# Altium PCB Volta-Interface.PcbDoc (part 1 of 2)
Units mil, origin at the board's own origin, x right, y up, seen from the top; angles counter-clockwise.
Board outline 3346.46 x 1023.62 mil, 2 copper layers (Component Side, Bottom Layer), stack 42.17 mil thick; 48 components, 34 nets, 179 pads, 58 vias.
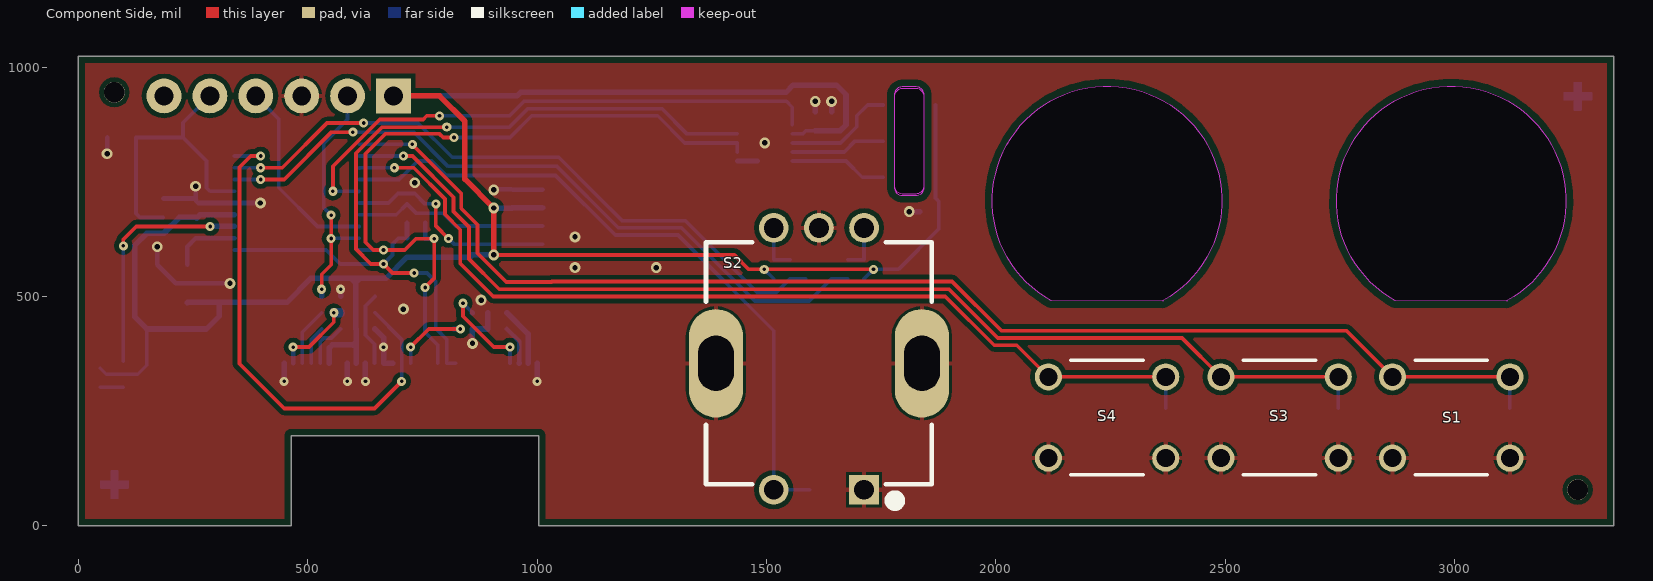
[diagram p0: Component Side view]
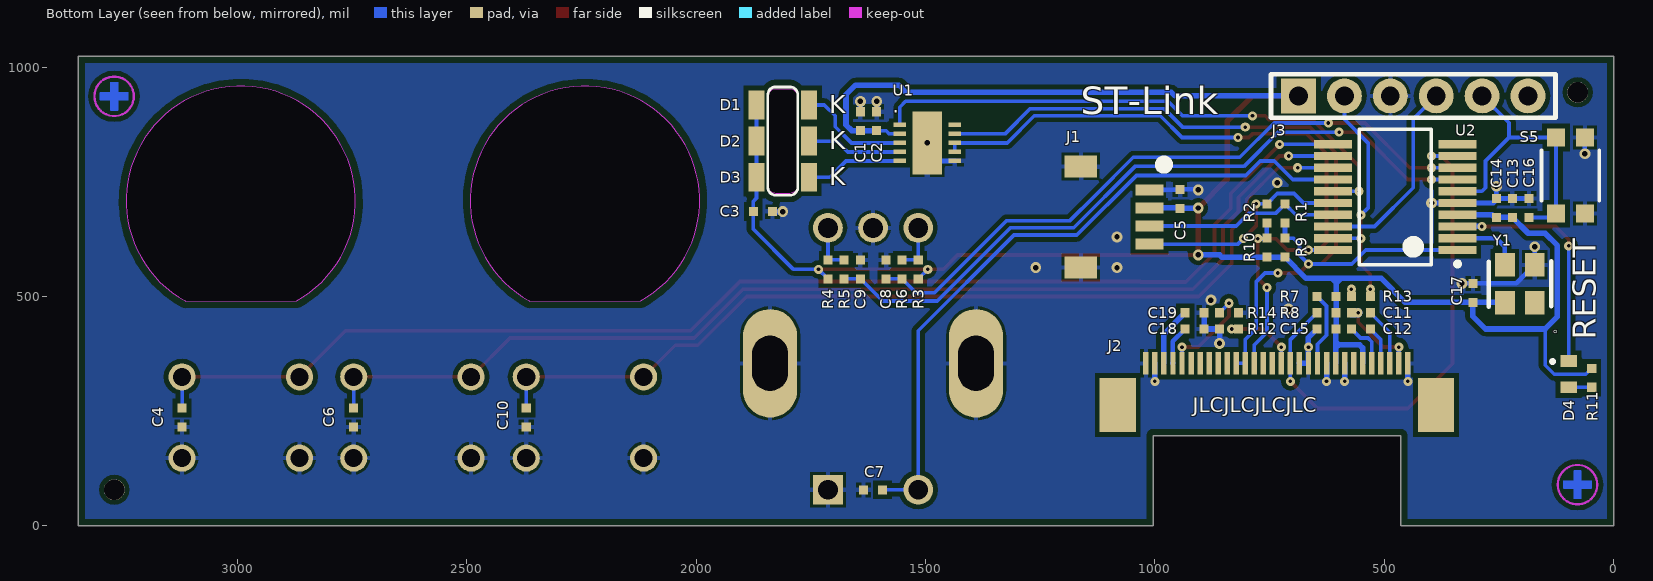
[diagram p1: Bottom Layer view, seen from below]
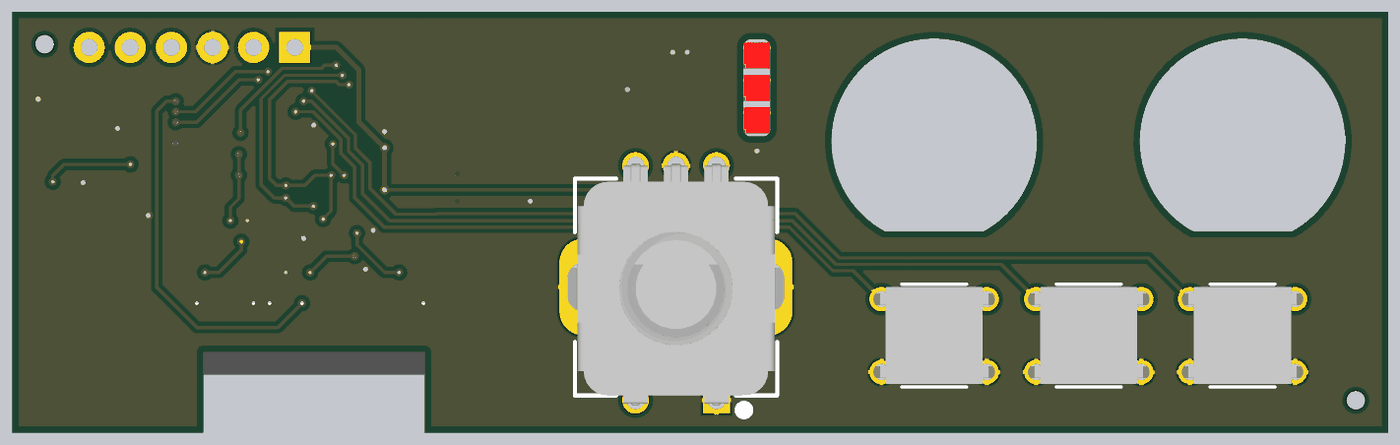
[diagram p3: 3D render of the assembled board from above, using the file's embedded part models]
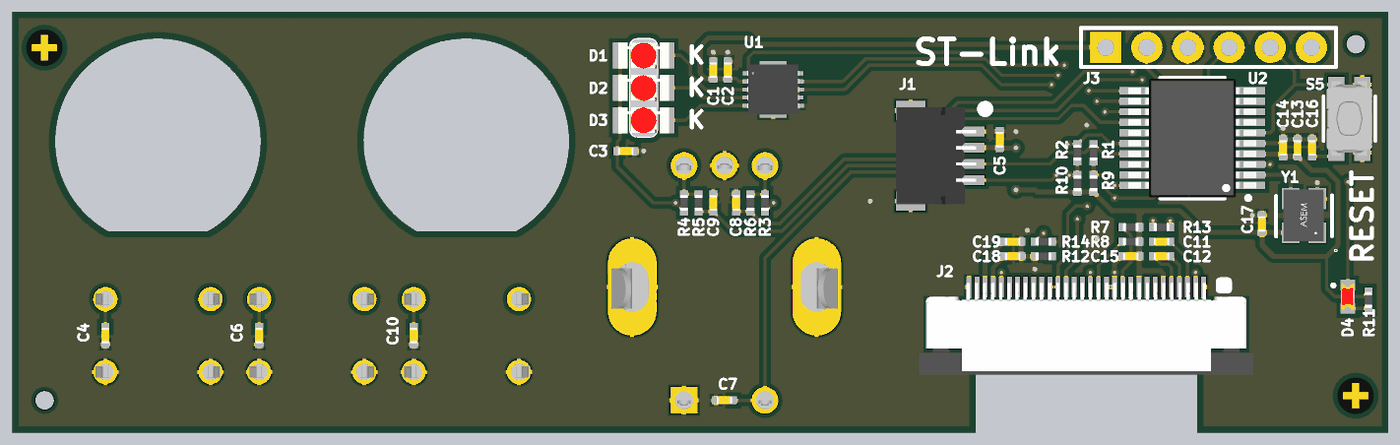
[diagram p4: 3D render of the assembled board from below, using the file's embedded part models]

## Layer stack, top to bottom
Top Solder: solder mask 0.4, Solder Resist, Dk 3.5
Component Side: signal copper 1.4
Dielectric 1: core 39.3701, FR-4, Dk 4.2
Bottom Layer: signal copper 1.4
Solder Side: solder mask 0.4, Solder Resist, Dk 3.5

## Board outline
0,0 0,1023.62 3346.46,1023.62 3346.46,0 1003.94,0 1003.94,196.85 464.57,196.85 464.57,0
cut-out: 2870.54,490.22 cw(c2992.13,708.66) 3113.71,490.22 3113.19,490.16
cut-out: 2120.54,490.22 cw(c2242.13,708.66) 2363.71,490.22 2363.19,490.16
cut-out: 1778.2,738.19 ccw(c1795.67,737.94) 1795.42,720.47 1825.94,720.47 ccw(c1826.18,737.94) 1843.65,737.7 1843.65,938.98 ccw(c1826.18,939.22) 1826.43,956.69 1825.44,956.69 1795.92,956.69 ccw(c1795.67,939.22) 1778.2,939.47
cut-out: 1778.2,742.13 ccw(c1795.67,741.88) 1795.42,724.41 1825.94,724.41 ccw(c1826.18,741.88) 1843.65,741.63 1843.65,935.04 ccw(c1826.18,935.29) 1826.43,952.76 1825.44,952.76 1795.92,952.76 ccw(c1795.67,935.29) 1778.2,935.53

## Design rules (kind name [scope] priority, off if disabled: settings)
BoardOutlineClearance [All] p1: gap=15 ignorepadtopadclearanceinfootprint=FALSE
Clearance "Clearance Polygons" [InPolygon] p1: gap=10 ignorepadtopadclearanceinfootprint=FALSE except(0: Arc-Hole Track-Hole SMDPad-Hole THPad-Hole Via-Hole Fill-Hole Poly-Hole Region-Hole Text-Hole)
Clearance [All] p2: gap=5 ignorepadtopadclearanceinfootprint=FALSE except(0: Arc-Hole Track-Hole SMDPad-Hole THPad-Hole Via-Hole Fill-Hole Poly-Hole Region-Hole Text-Hole)
ComponentClearance "HM-TRP & UFL" [InComponent('X1') vs InComponent('U1')] p1: gap=0 collisioncheckmode=3 verticalgap=0 showdistances=FALSE
ComponentClearance [All] p2: gap=1 collisioncheckmode=3 verticalgap=1 showdistances=FALSE
DiffPairsRouting [All] p1: maxlimit=393.7 minlimit=5 mostfreqgap=8 toplayer_minwidth=5 toplayer_maxwidth=15 toplayer_prefwidth=8 bottomlayer_minwidth=5 bottomlayer_maxwidth=15 bottomlayer_prefwidth=8 maxuncoupledlength=500
HoleSize [All] p1: absolutevalues=TRUE maxlimit=265 minlimit=7.87 maxpercent=80.000 minpercent=20.000
HoleToHoleClearance [All] p1: gap=10 allowstackedmicrovias=FALSE
MinimumAnnularRing [All] p1: minimumring=4
MinimumSolderMaskSliver [All] p1: minsoldermaskwidth=0
PlaneClearance [All] p1: clearance=10
PlaneConnect [All] p1: planeconnectstyle=Relief reliefexpansion=4 reliefentries=4 reliefconductorwidth=6 reliefairgap=6
PolygonConnect "Via connect style" [isVia] p1: connectstyle=Direct reliefconductorwidth=10 reliefentries=4 polygonreliefangle="90 Angle" airgapwidth=10
PolygonConnect [All] p2: connectstyle=Relief reliefconductorwidth=10 reliefentries=4 polygonreliefangle="90 Angle" airgapwidth=6
RoutingCorners [All] p1: cornerstyle=45-Degree minsetback=49.21 maxsetback=49.21
RoutingVias [All] p1: holewidth=12 width=22 viastyle="Through Hole" minholewidth=10 minwidth=18 maxholewidth=100 maxwidth=114
SilkToSilkClearance [All] p1: silktosilkclearance=0
SilkToSolderMaskClearance [IsPad] p1: minsilkscreentomaskgap=1 clearancetoexposedcopper=TRUE
SolderMaskExpansion [All] p1: expansion=2.5
Width GND [InNet('GND')] p1: maxlimit=30 minlimit=10 preferedwidth=20
Width Power [InNetClass('Power')] p2: maxlimit=40 minlimit=20 preferedwidth=30
Width 3V3 [InNetClass('3V3')] p3: maxlimit=30 minlimit=10 preferedwidth=20
Width [All] p4: maxlimit=400 minlimit=6 preferedwidth=8
20 further rules are at their usual default settings.

## Classes and differential pairs
component class Interface: C1 C2 C3 C4 C5 C6 C7 C9 C10 C11 C12 C13 C14 C15 C16 C17 C18 C19 C20 D4 J1 J2 R1 R2 R3 R4 R5 R6 R7 R8 R9 R10 R11 R12 R13 R14 S2 S5 U1 U2 Y1

## Components (designator, comment, footprint, x,y, rotation, side; value= is the part's Value field where it differs from the comment)
C1 "2.2uF" 0402 1641.73,881.89 r270 bottom
C2 "0.1uF" 0402 1606.3,881.89 r270 bottom
C3 "2.2uF" 0402 1854.33,685.04 r0 bottom
C4 "2.2uF" 0402 3120.08,236.22 r270 bottom
C5 "2.2uF" 0402 944.88,712.6 r270 bottom
C6 "2.2uF" 0402 2746.06,236.22 r270 bottom
C7 "2.2uF" 0402 1614.17,78.74 r180 bottom
C8 "0.01uF" 0402 1585.63,559.06 r270 bottom
C9 "0.01uF" 0402 1641.73,559.06 r270 bottom
C10 "2.2uF" 0402 2370.08,236.22 r270 bottom
C11 "2.2uF" 0402 551.18,464.57 r180 bottom
C12 "2.2uF" 0402 551.18,429.13 r0 bottom
C13 "2.2uF" 0402 220.47,692.91 r270 bottom
C14 "0.1uF" 0402 255.91,692.91 r270 bottom
C15 "2.2uF" 0402 625.98,429.13 r180 bottom
C16 "0.1uF" 0402 185.04,692.91 r270 bottom
C17 "0.01uF" 0402 307.09,507.87 r270 bottom
C18 "2.2uF" 0402 913.39,429.13 r0 bottom
C19 "10uF" 0402 913.39,464.57 r0 bottom
D1 "LED" 1206_LED 1811.02,917.32 r180 bottom
D2 "LED" 1206_LED 1811.02,838.58 r180 bottom
D3 "LED" 1206_LED 1811.02,759.84 r180 bottom
D4 "LED_GRN" 0603_LED_Red 98.43,330.71 r90 bottom
J1 "CCSH-W10R-04TR-BK-A" PCBCOMPONENT_1 1196.85,807.09 r270 bottom
J2 "ER-CON30HT-1" ER-CON30HT-1 734.25,236.22 r180 bottom locked
J3 "DNP" 801-93-006-10-012000 437.01,937.01 r180 bottom
R1 "DNP" 0402 716.54,681.1 r90 bottom
R2 "DNP" 0402 755.91,681.1 r90 bottom
R3 "10k" 0402 1515.75,559.06 r90 bottom
R4 "10k" 0402 1712.6,559.06 r90 bottom
R5 "10k" 0402 1677.17,559.06 r270 bottom
R6 "10k" 0402 1551.18,559.06 r270 bottom
R7 "10k" 0402 625.98,500 r180 bottom
R8 "10k" 0402 625.98,464.57 r180 bottom
R9 "2.7k" 0402 716.54,606.3 r270 bottom
R10 "2.7k" 0402 755.91,606.3 r270 bottom
R11 "1k" 0402 48.05,322.83 r90 bottom
R12 "10k" 0402 838.58,429.13 r180 bottom
R13 "10k" 0402 551.18,500 r0 bottom
R14 "390k" 0402 838.58,464.57 r0 bottom
S1 "B3F-105X" B3F-105X 2992.13,236.22 r180 top
S2 "PEC11R-4115F-S0018" PEC11R-4xxxF-Sxxxx 1614.17,354.33 r180 top locked
S3 "B3F-105X" B3F-105X 2618.11,236.22 r180 top
S4 "B3F-105X" B3F-105X 2242.13,236.22 r180 top
S5 "KMR243GLFG" "KMR 2 SERIES" 94.49,763.78 r90 bottom
U1 "IS31FL3193" DFN-10 1496.06,834.65 r180 bottom
U2 "STM32G031F6P6" TSSOP-20 476.38,716.54 r0 bottom
Y1 "ASE-12.000-MHZ-E-T" ASE-XXXXX-X-X-X 204.72,527.56 r90 bottom

## Footprints (in the part's own frame and the unit in brackets; to place one, negate y for a bottom-side part, rotate by r counter-clockwise, add the part's x,y. Pads: shape width x height; smd on the part's side, far side on the other; paste and mask are expansions set on the pad)
0402 [mm] "Chip Capacitor; Body 1.0 x 0.5 mm (LxW typ)"
  rect 0.5x0.5 smd mask+0.038: 1(-0.525,0) 2(0.525,0)
  body extent -0.5,-0.25 0.5,0.25, height 0.6
0603_LED_Red [mm]
  rect 0.65x0.9 smd mask+0.038: 1(-0.725,0) 2(0.725,0)
  silkscreen extent 0.64,0.83 0.76,0.95, body extent -0.8,-0.4 0.8,0.4, height 0.6
801-93-006-10-012000 [mil] "CONN SOCKET STRIP LOPRO 0.100 PITCH 6POS"
  rect 76x76 hole 41 mask+1.5: 1(-250,0)
  round 76 hole 41 mask+1.5: 2(-150,0) 3(-50,0) 4(50,0) 5(150,0) 6(250,0)
  silkscreen extent -310,-48 310,48, body extent -310,-48 310,48, height 165
1206_LED [mm] "SMD LED 3.2 x 1.6 mm (LxW typ)"
  rect 0.9x1.6 smd mask+0.038: 1(-1.45,0) 2(1.45,0)
  body extent -1.6,-0.8 1.6,0.8, height 1.79
ASE-XXXXX-X-X-X [mil] "OSC XO x.xxxMHZ CMOS SMD"
  rect 51x43 smd mask+1.5: 1(-41.5,-32.5) 2(41.5,-32.5) 3(41.5,32.5) 4(-41.5,32.5)
  silkscreen extent -50,-68 49,68, body extent -62,-48 64,50, height 34
B3F-105X [mm]
  round 1.5 hole 1: 1(-3.25,2.25) 1(3.25,2.25) 2(-3.25,-2.25) 2(3.25,-2.25)
  silkscreen extent -2,-3.18 2,3.18, body extent -3.85,-3 3.85,3, height 10
DFN-10 [mm]
  rect 0.7x0.25 smd mask+0.038: 1(-1.525,1) 2(-1.525,0.5) 3(-1.525,0) 4(-1.525,-0.5) 5(-1.525,-1) 6(1.525,-1) 7(1.525,-0.5) 8(1.525,0) 9(1.525,0.5) 10(1.525,1)
  rect 1.65x3.5 smd mask+0.038: 11(0,0)
  body extent -1.6,-1.55 1.6,1.55, height 0.81
ER-CON30HT-1 [mm]
  rect 0.3x1.25 smd paste+0: 1(7.25,3) 2(6.75,3) 3(6.25,3) 4(5.75,3) 5(5.25,3) 6(4.75,3) 7(4.25,3) 8(3.75,3) 9(3.25,3) 10(2.75,3) 11(2.25,3) 12(1.75,3) 13(1.25,3) 14(0.75,3) 15(0.25,3) 16(-0.25,3) 17(-0.75,3) 18(-1.25,3) 19(-1.75,3) 20(-2.25,3) 21(-2.75,3) 22(-3.25,3) 23(-3.75,3) 24(-4.25,3) 25(-4.75,3) 26(-5.25,3) 27(-5.75,3) 28(-6.25,3) 29(-6.75,3) 30(-7.25,3)
  rect 2x3 smd paste+0: S1(8.81,0.7) S2(-8.81,0.7)
  rrect50% 1x1 on Bottom Overlay: ""(8.5,3.1)
  body extent -10.32,-2.4 10.33,3.25, height 2.2
"KMR 2 SERIES" [mm]
  rect 1x1 smd: 1(-2.1,0.8) 1(2.1,0.8) 2(-2.1,-0.8) 2(2.1,-0.8)
  silkscreen extent -1.4,-1.6 1.4,1.6, body extent -2.3,-1.4 2.3,1.4, height 1.92
PCBCOMPONENT_1 [mm]
  rect 0.6x1.55 smd: 1(1.9,4.7) 2(2.9,4.7) 3(3.9,4.7) 4(4.9,4.7)
  rect 1.2x1.8 smd: S1(0.6,0.9) S2(6.2,0.9)
  silkscreen extent 0.3,5.3 0.7,5.7, body extent 0.4,0.01 6.4,4.96, height 3.25
PEC11R-4xxxF-Sxxxx [mm]
  rect 1.65x1.65 hole 1.1: 1(-2.502,7)
  round 1.65 hole 1.1: 2(2.498,7) A(-2.502,-7.5) B(2.498,-7.5) COM(-0.002,-7.5)
  oval 3x6 hole 1.981 slot 3.048 at 90 deg: S1(-5.702,0) S2(5.698,0)
  silkscreen extent -6.25,-6.7 6.25,7.85, body extent -7,-7.6 7,7.3, height 21.6
TSSOP-20 [mm] "Plastic Small Outline"
  rect 2.1x0.45 smd mask+0.038: 1(-3.45,2.925) 2(-3.45,2.275) 3(-3.45,1.625) 4(-3.45,0.975) 5(-3.45,0.325) 6(-3.45,-0.325) 7(-3.45,-0.975) 8(-3.45,-1.625) 9(-3.45,-2.275) 10(-3.45,-2.925) 11(3.45,-2.925) 12(3.45,-2.275) 13(3.45,-1.625) 14(3.45,-0.975) 15(3.45,-0.325) 16(3.45,0.325) 17(3.45,0.975) 18(3.45,1.625) 19(3.45,2.275) 20(3.45,2.925)
  silkscreen extent -3.57,-3.75 2,3.82, body extent -3.95,-3.66 3.95,3.67, height 1.98

## Part data
C1 C3 C4 C5 C6 C7 C10 C13: library part CAP, "Multilayer Ceramic Capacitors MLCC - SMD/SMT 2.2UF 25V 10% 0402", Manufacturer="Murata Electronics", Part Number=GRM155R61E225KE11D, Voltage=25V, ClassName=Interface
C2 C14 C16: library part CAP, "CAP CER 0.1UF 50V X7R 0402", Manufacturer="Taiyo Yuden", Part Number=UMK105B7104KVHF, Voltage=50V, ClassName=Interface
C8 C9 C17: library part CAP, "CAP CER 0.01UF 100V X7R 0402", Manufacturer="Taiyo Yuden", Part Number=HMR105B7103MV-F, Voltage=100V, ClassName=Interface
C11 C12 C15 C18 C19: library part CAP, "CAP CER 10UF 10V X6S 0603", Manufacturer="Murata Electronics", Part Number=GRM188C81A106MA73D, Voltage=25V, ClassName=Interface
D4: library part LED_Red, "Standard LEDs - SMD HE Red 645 nm Water Clear", Manufacturer=Bivar, Part Number=SM0603HCL, ClassName=Interface
J1: Manufacturer=JST, ClassName=Interface, Part Number=CCSH-W10R-04TR-BK-A
J2: "30 PINS 0.5 PITCH SMD TOP CONTACT CONN", Manufacturer="EastRising Technology", ClassName=Interface, Part Number=ER-CON30HT-1
J3: library part 801-93-006-10-012000, "CONN SOCKET STRIP LOPRO 6POS", Manufacturer=Mill-Max, ClassName=Interface, Part Number=801-93-006-10-012000
R1 R2: library part RES, "Thick Film Resistors - SMD 1/16watt 0ohm Commercial Use", Manufacturer="Vishay / Dale", Part Number=CRCW04020000Z0EDC, ClassName=Interface
R3 R4 R5 R6 R13: library part RES, "Thick Film Resistors - SMD 10K OHM 1%", Manufacturer=Bourns, Part Number=CR0402-FX-1002GLF, ClassName=Interface
R7 R8 R12 R14: library part RES, "Thick Film Resistors - SMD 0603 5.1Kohm 5% High Voltage", Manufacturer="ROHM Semiconductor", Part Number=KTR03EZPJ512, ClassName=Interface
R9 R10: library part RES, "Thick Film Resistors - SMD 0402 2.7Kohms 1% AEC-Q200", Manufacturer=Panasonic, Part Number=ERJ-2RKF2701X, ClassName=Interface
R11: library part RES, "Thick Film Resistors - SMD ResA 0402 1k 1% 63mW TC100", Manufacturer=Bourns, Part Number=CR0402AFX-1001GLF, ClassName=Interface
S1 S3 S4: "SWITCH TACTILE SPST-NO 0.05A 24V", Manufacturer="Omron Electronics Inc-EMC Div", Part Number=B3F-105X
S2: library part PEC11R-4xxxF-Sxxxx, "ROTARY ENCODER MECHANICAL XXPPR", Manufacturer=Bourns, ClassName=Interface, Part Number=PEC11R-4115F-S0018
S5: library part "KMR 2 Series", "Tactile Switch SPST-NO Top Actuated Surface Mount", Manufacturer=C&K, Part Number=KMR243GFLG, ClassName=Interface
U1: "IC LED DRIVER LINEAR 42MA 10DFN", Manufacturer="Lumissil Microsystems", Part Number=IS31FL3193-DLS2-TR, ClassName=Interface
U2: "IC MCU 32BIT 32KB FLASH 20TSSOP", Manufacturer=STMicroelectronics, ClassName=Interface, Part Number=STM32G031F6P6
Y1: library part ASE-XXXXX-MHZ-X-X, "OSC XO 12.000MHZ CMOS SMD", Manufacturer=Abracon, ClassName=Interface, Part Number=ASE-12.000-MHZ-E-T

## Free pads (board coordinates)
  round 45.35 hole 45.35 unplated: TH(78.74,944.88) TH(3267.72,78.74)

## Via types
v1: diameter 19.68, hole 7.87, Component Side to Bottom Layer, tented both sides, 39 vias
v2: diameter 23.62, hole 11.81, Component Side to Bottom Layer, tented both sides, 19 vias

## Nets (pads, with @x,y where several pads share a name; then routed paths per layer and width w, separated by ;. In a path a pad name is that pad's centre, name@x,y a point inside that pad or via, vN(x,y) a via of type N, cw(c..) or ccw(c..) an arc to the next point about the centre after c; other vN are vias at no path point)
+3.3V: C1.2 C2.2 C3.2 C5.2 C13.2 C14.2 C15.2 C17.2 D1.1 D2.1 D3.1 J1.2 J2.6 J2.9 J3.1 R3.1 R4.1 R7.2 R8.2 R9.2 R10.2 R11.2 U1.2 U2.4 Y1.4 | length 5004.5
  Component Side w8: v2(905.51,590.55) 1429.98,590.55 1461.47,559.06 v1(1495.08,559.06) v1(1733.27,559.06)
  Component Side w12: J3.1@687.01,937.01 787.4,937.01 842.52,881.89 842.52,755.91 v2(905.51,692.91) v2(905.51,590.55)
  Bottom Layer w8: R11.2@48.05,343.5 60.85,330.71 129.92,330.71 149.61,350.39 149.61,429.13 ; C5.2@944.88,691.93 C5.2@945.87,692.91 ; v1(1495.08,559.06) R3.1@1515.75,538.39 ; U1.2@1556.11,854.33 1578.74,854.33 1585.63,861.22 C2.2@1606.3,861.22 ; R4.1@1712.6,538.39 v1(1733.27,559.06) 1787.4,559.06 1875,646.65 C3.2@1875,685.04 1875,707.68 1868.11,714.57 D3.1@1868.11,759.84 D2.1@1868.11,838.58 D1.1@1868.11,917.32
  Bottom Layer w12: Y1.4@237.22,486.06 238.37,487.2 C17.2@307.09,487.2 ; C14.2@255.91,672.24 C13.2@220.47,672.24 220.47,671.83 186.44,637.8 149.61,637.8 122.72,610.91 122.72,456.02 149.61,429.13 279.53,429.13 307.09,456.69 C17.2@307.09,487.2 ; C14.2@257.87,670.28 265.75,678.15 U2.4@340.55,678.15 ; J2.6@547.24,354.33 547.24,387.8 553.9,394.45 599.17,394.45 ; 605.32,528.54 594.49,539.37 ; J2.9@606.3,354.33 606.3,387.32 ; J3.1@687.01,937.01 956.07,937.01 964.04,944.98 1542.27,944.98 1557.92,960.63 1652.31,960.63 1673.23,939.71 1673.23,874.02 1660.43,861.22 C1.2@1641.73,861.22 C2.2@1606.3,861.22 ; v2(905.51,590.55) 859.25,590.55 854.33,585.63 R10.2@755.91,585.63 R9.2@716.54,585.63 670.28,539.37 614.17,539.37 ; v2(905.51,692.91) 906.5,691.93 C5.2@944.88,691.93 ; C5.2@945.87,692.91 J1.2@1011.81,692.91 ; C17.2@307.09,487.2 454.53,487.2 506.69,539.37 594.49,539.37 ; 594.49,539.37 614.17,539.37 ; 599.17,394.45 606.3,387.32 ; 599.17,394.45 606.3,401.57 ; 606.3,387.32 606.3,401.57 ; 606.3,401.57 606.3,428.15 C15.2@605.32,429.13 R8.2@605.32,464.57 R7.2@605.32,500 605.32,530.51 614.17,539.37
BUTTON_A: C4.1 S1.2 U2.11 | length 2841.9
  Component Side w8: v1@727.36,831.69 834.65,724.41 834.65,691.98 870.08,656.54 870.08,594.49 932.83,531.74 1031.5,531.74 1032.44,532.68 1904.32,532.68 2011.89,425.12 2763.86,425.12 S1.2@2864.17,324.8 S1.2@3120.08,324.8
  Bottom Layer w8: U2.11@612.2,831.69 v1@727.36,831.69 ; C4.1@3120.08,256.89 S1.2@3120.08,324.8
  other v1: 728.35,831.69
BUTTON_B: C6.1 S3.2 U2.12 | length 2460.5
  Component Side w8: v1(708.66,806.1) 728.35,806.1 817.91,716.54 817.91,685.04 851.58,651.37 851.58,581.49 917.32,515.75 1897.64,515.75 2003.94,409.45 2405.51,409.45 S3.2@2490.16,324.8 S3.2@2746.06,324.8
  Bottom Layer w8: U2.12@612.2,806.1 v1(708.66,806.1) ; C6.1@2746.06,256.89 S3.2@2746.06,324.8
BUTTON_C: C10.1 S4.2 U2.13 | length 2078.8
  Component Side w8: v1(688.98,780.51) 731.3,780.51 799.21,712.6 799.21,679.17 832.82,645.57 832.82,571.71 904.53,500 1889.76,500 1996.06,393.7 2045.28,393.7 S4.2@2114.17,324.8 S4.2@2370.08,324.8
  Bottom Layer w8: U2.13@613.19,779.53 U2.13@612.2,780.51 v1(688.98,780.51) ; C10.1@2370.08,256.89 S4.2@2370.08,324.8
DISP_RST: J2.14 R8.1 U2.9 | length 1133.4
  Component Side w8: v1(397.64,806.1) 375.98,806.1 351.52,781.64 351.52,353.2 448.82,255.91 645.67,255.91 v1(704.72,314.96)
  Bottom Layer w8: U2.9@340.55,806.1 v1(397.64,806.1) ; R8.1@646.65,464.57 704.72,406.5 J2.14@704.72,354.33 v1(704.72,314.96)
ENC_A: C9.2 R5.2 U2.7 | length 1552
  Component Side w8: v1(397.64,754.92) 448.82,754.92 552.17,858.27 v1(598.43,858.27)
  Bottom Layer w8: U2.7@340.55,754.92 v1(397.64,754.92) ; v1(598.43,858.27) 731.3,858.27 806.1,783.46 1043.31,783.46 1177.17,649.61 1314.96,649.61 1474.57,490 1593.35,490 C9.2@1641.73,538.39 R5.2@1677.17,538.39
ENC_B: C8.2 R6.2 U2.8 | length 1451.4
  Component Side w8: v1(397.64,780.51) 444.88,780.51 542.32,877.95 v1(622.05,877.95)
  Bottom Layer w8: U2.8@340.55,780.51 v1(397.64,780.51) ; v1(622.05,877.95) 740.16,877.95 814.96,803.15 1047.24,803.15 1131.89,718.5 1185.04,665.35 1322.91,665.35 1480.39,507.87 1520.67,507.87 R6.2@1551.18,538.39 C8.2@1585.63,538.39
ENC_SW: C7.2 S2.2 U2.14 | length 1497.7
  Bottom Layer w8: U2.14@612.2,754.92 699.8,754.92 740.16,795.28 770.59,795.28 802.09,763.78 1040.35,763.78 1170.28,633.86 1307.09,633.86 1515.83,425.12 S2.2@1515.83,78.74 C7.2@1593.5,78.74
EXT_SCL: J1.4 R2.2 U2.16 | length 483.6
  Component Side w8: v1(779.53,701.77) 779.53,653.54 v1(807.09,625.98) ; v1@808.14,627.04 v1@809.2,625.98
  Bottom Layer w8: U2.16@612.2,703.74 676.18,703.74 696.85,724.41 733.27,724.41 R2.2@755.91,701.77 v1(779.53,701.77) ; v1(807.09,625.98) 818.9,614.17 J1.4@1011.81,614.17
EXT_SDA: J1.3 R1.2 U2.17 | length 429.4
  Bottom Layer w8: U2.17@612.2,678.15 692.91,678.15 R1.2@716.54,701.77 737.2,681.1 795.28,681.1 822.83,653.54 J1.3@1011.81,653.54
GND: C1.1 C2.1 C3.1 C4.2 C5.1 C6.2 C7.1 C8.1 C9.1 C10.2 C13.1 C14.1 C15.1 C16.1 C17.1 C18.1 C19.1 J1.1 J1.S1 J1.S2 J2.1 J2.8 J2.10 J2.12 J2.13 J2.29 J2.30 J3.3 R12.1 R13.2 R14.1 S1.1 S2.1 S2.COM S2.S1 S2.S2 S3.1 S4.1 S5.2 U1.6 U1.11 U2.5 Y1.2 | length 1086.1
  Bottom Layer w10: v2(62.99,811.02) S5.2@62.99,846.46 ; v2(172.22,608.27) Y1.2@172.22,569.06 212.74,528.54 C17.1@307.09,528.54 v2(330.71,528.54) ; C16.1@185.04,713.58 C13.1@220.47,713.58 C14.1@255.91,713.58 v2(255.91,740.16) ; C14.1@255.91,709.65 261.81,703.74 U2.5@340.55,703.74 v2(397.01,703.74) ; v2(905.51,732.28) 906.5,733.27 C5.1@944.88,733.27 945.87,732.28 J1.1@1011.81,732.28 ; U1.6@1436.03,795.28 U1.11@1480.32,795.28
  Bottom Layer w12: v1(448.82,314.96) J2.1@448.82,354.33 ; R13.2@571.85,500 v1(571.85,515.75) ; v1(586.61,314.96) J2.8@586.61,354.33 ; v1(625.98,314.96) J2.10@625.98,354.33 ; C15.1@646.65,429.13 665.35,410.43 v1(665.35,389.76) J2.12@665.35,354.33 J2.13@685.04,354.33 ; v2(859.25,397.64) R12.1@859.25,429.13 C18.1@892.72,429.13 C19.1@892.72,464.57 ; v1(1000,314.96) J2.29@1000,354.33 ; C2.1@1606.3,902.56 v2(1606.3,925.2) ; C1.1@1641.73,902.56 v2(1641.73,925.2) ; v2(1811.02,685.04) C3.1@1833.66,685.04
  other v2: 708.66,472.44 877.95,492.13 1082.68,562.99 1259.84,562.99 1082.68,629.92 733.27,748.03 1496.07,834.65
LED_DVR_EN: U1.1 U2.15 | length 1216.3
  Component Side w8: v1(555.12,729.33) 555.12,784.05 656.9,885.83 751.97,885.83 759.84,893.7 v1(787.4,893.7)
  Bottom Layer w8: v1(555.12,729.33) U2.15@612.2,729.33 U2.15@611.22,728.35 ; v1(787.4,893.7) 939.96,893.7 971.46,925.2 1543.31,925.2 1556.11,912.4 U1.1@1556.11,874.02
MCU_SCL: J2.18 R2.1 R10.1 U1.7 U1.8 U2.20 | length 1652.4
  Component Side w8: v1(755.91,519.68) 775.59,539.37 v1(775.59,625.98) 736.22,625.98 711.61,601.38 v1(665.35,601.38) 642.89,601.38 625.98,618.28 625.98,811.02 669.29,854.33 787.4,854.33 795.28,846.46 v1(818.9,846.46)
  Bottom Layer w8: U2.20@612.2,601.38 v1(665.35,601.38) ; v1(755.91,519.68) 755.91,422.01 783.46,394.45 J2.18@783.46,354.33 ; v1(818.9,846.46) 940.94,846.46 988.19,893.7 1262.8,893.7 1321.85,834.65 U1.8@1436.03,834.65 U1.7@1436.03,814.96
  Bottom Layer w10: R2.1@755.91,660.43 R10.1@755.91,626.97 756.89,625.98 v1(775.59,625.98)
MCU_SDA: J2.19 J2.20 R1.1 R9.1 U1.9 U2.1 | length 1972.5
  Component Side w8: v1(732.28,551.18) 685.04,551.18 v1(665.35,570.87) 637.8,570.87 605.32,603.35 605.32,812.01 662.4,869.09 v1(803.15,869.09)
  Bottom Layer w8: U2.1@340.55,601.38 540.35,601.38 570.87,570.87 v1(665.35,570.87) 685.04,590.55 685.04,614.17 697.83,626.97 R9.1@716.54,626.97 ; v1(732.28,551.18) 760.08,551.18 779.53,531.74 779.53,430.12 803.15,406.5 J2.19@803.15,354.33 J2.20@822.83,354.33 ; v1(803.15,869.09) 939.96,869.09 980.31,909.45 1271.65,909.45 1326.77,854.33 U1.9@1436.03,854.33
  Bottom Layer w10: R9.1@716.54,626.97 R1.1@716.54,660.43
NetC11_1: C11.1 J2.2 | length 181.9
  Component Side w8: v1(468.5,389.76) 502.95,389.76 557.09,443.9 v1(557.09,464.57)
  Bottom Layer w10: J2.2@468.5,354.33 v1(468.5,389.76)
  Bottom Layer w20: v1(557.09,464.57) C11.1@571.85,464.57
NetC11_2: C11.2 J2.3 | length 127.8
  Bottom Layer w8: J2.3@488.19,354.33 488.19,422.24 C11.2@530.51,464.57
NetC12_1: C12.1 J2.4 | length 84.2
  Bottom Layer w8: J2.4@507.87,354.33 507.87,406.5 C12.1@530.51,429.13
NetC12_2: C12.2 J2.5 | length 103
  Bottom Layer w8: J2.5@527.56,354.33 527.56,401.57 535.43,409.45 552.17,409.45 C12.2@571.85,429.13
NetC18_2: C18.2 J2.27 | length 86
  Bottom Layer w10: C18.2@934.06,429.13 960.8,402.39 J2.27@960.8,354.5
  Bottom Layer w12: J2.27@960.63,354.33 J2.27@960.8,354.5
NetC19_2: C19.2 J2.28 | length 129.4
  Bottom Layer w12: C19.2@934.06,464.57 980.31,418.31 J2.28@980.31,354.33
NetD1_2: D1.2 U1.3 | length 245.9
  Bottom Layer w8: U1.3@1556.11,834.65 1661.42,834.65 1696.85,870.08 1696.85,893.7 1720.47,917.32 D1.2@1753.94,917.32
NetD2_2: D2.2 U1.4 | length 207.6
  Bottom Layer w8: U1.4@1556.11,814.96 1669.29,814.96 1692.91,838.58 D2.2@1753.94,838.58
NetD3_2: D3.2 U1.5 | length 212.5
  Bottom Layer w8: U1.5@1556.11,795.28 1673.23,795.28 1708.66,759.84 D3.2@1753.94,759.84
NetD4_1: D4.1 R11.1 | length 50.4
  Bottom Layer w8: R11.1@48.05,302.17 D4.1@98.43,302.17
NetD4_2: D4.2 U2.3 | length 519
  Component Side w8: v1(98.43,610.24) 98.43,624.44 126.54,652.56 v1(287.4,652.56)
  Bottom Layer w8: D4.2@98.43,359.25 v1(98.43,610.24)
  Bottom Layer w12: v1(287.4,652.56) U2.3@340.55,652.56
NetJ2_11: J2.11 R7.1 | length 162.4
  Bottom Layer w8: J2.11@645.67,354.33 645.67,395.67 625.98,415.36 625.98,479.33 R7.1@646.65,500
NetJ2_26: J2.26 R14.2 | length 223.3
  Component Side w8: v1(838.58,485.23) 838.58,456.69 905.51,389.76 v1(940.94,389.76)
  Bottom Layer w8: v1(838.58,485.23) R14.2@859.25,464.57 ; J2.26@940.94,354.33 v1(940.94,389.76)
NetR3_2: R3.2 R6.1 S2.B | length 105.3
  Bottom Layer w8: S2.B@1515.83,649.61 1515.75,649.53 R3.2@1515.75,579.72 R6.1@1551.18,579.72
NetR4_2: R4.2 R5.1 S2.A | length 105.3
  Bottom Layer w8: R5.1@1677.17,579.72 R4.2@1712.6,579.72 1712.6,649.53 S2.A@1712.68,649.61
NetU2_2: U2.2 Y1.3 | length 150.5
  Bottom Layer w10: Y1.3@237.22,569.06 237.22,608.56 255.63,626.97 U2.2@340.55,626.97
NRST: C16.2 J3.5 S5.1 U2.6 | length 640
  Bottom Layer w8: C16.2@185.04,672.24 134.84,672.24 S5.1@125.98,681.1 S5.1@125.98,846.46 228.35,846.46 ; J3.5@287.01,937.01 228.35,878.35 228.35,846.46 ; U2.6@340.55,729.33 287.4,729.33 279.53,737.2 279.53,795.28 228.35,846.46
SA0: J2.15 R12.2 | length 174.9
  Component Side w8: v1(724.41,389.76) 763.8,429.15 v1(832.72,429.15)
  Bottom Layer w8: J2.15@724.41,354.33 v1(724.41,389.76)
  Bottom Layer w10: R12.2@817.93,429.15 v1(832.72,429.15)
SWCLK: J3.2 R13.1 U2.19 | length 534.8
  Component Side w8: v1(530.51,515.75) 530.51,548.23 551.18,568.9 v1(551.18,626.3) v1(551.18,677.17)
  Bottom Layer w8: v1(551.18,626.3) 551.85,626.97 U2.19@612.2,626.97 ; v1(551.18,677.17) 535.43,692.91 535.43,834.65 587.01,886.22 J3.2@587.01,937.01
  Bottom Layer w12: R13.1@530.51,500 v1(530.51,515.75)
SWDIO: J3.4 U2.18 | length 430.8
  Bottom Layer w8: J3.4@387.01,937.01 437.01,887.01 437.01,737.2 521.65,652.56 U2.18@612.2,652.56
pads on no net: J2. J2.7 J2.16 J2.17 J2.21 J2.22 J2.23 J2.24 J2.25 J2.S1 J2.S2 J3.6 U1.10 U2.10 Y1.1

## Polygon pours and split planes (outlines as drawn)
GND on Bottom Layer "Bottom_GND" (solid, remove dead copper, pour order 57): 0,0 3346.46,0 3346.46,1023.62 0,1023.62
GND on Component Side "Top_GND" (solid, remove dead copper, pour order 56): 0,0 3346.46,0 3346.46,1023.62 0,1023.62

## Keep-outs
Bottom Layer:
  circle w5: c3268.11,936.3 r43
  circle w5: c79.13,89.84 r43

## Other copper
Bottom Layer:
  region: 3276.38,967.06 3276.69,966.3 3276.69,944.88 3298.11,944.88 3298.88,944.56 3299.19,943.8 3299.19,928.8 3298.88,928.03 3298.11,927.72 3276.69,927.72 3276.69,906.3 3276.38,905.53 3275.61,905.22 3260.61,905.22 3259.84,905.53 3259.53,906.3 3259.53,927.72 3238.11,927.72 3237.34,928.03 3237.03,928.8 3237.03,943.8 3237.34,944.56 3238.11,944.88 3259.67,944.88 3259.53,966.29 3259.53,966.3 3259.68,966.68 3259.84,967.06 3260.22,967.22 3260.6,967.38 3260.61,967.38 3275.61,967.38
  region: 87.4,120.61 87.72,119.84 87.72,98.43 109.13,98.43 109.9,98.11 110.22,97.34 110.22,82.34 109.9,81.58 109.13,81.26 87.72,81.26 87.72,59.84 87.4,59.08 86.63,58.76 71.63,58.76 70.87,59.08 70.55,59.84 70.55,81.26 49.13,81.26 48.37,81.58 48.05,82.34 48.05,97.34 48.37,98.11 49.13,98.43 70.69,98.43 70.55,119.84 70.71,120.22 70.86,120.6 70.87,120.6 70.87,120.61 71.25,120.76 71.63,120.93 71.63,120.92 71.63,120.93 86.63,120.93

## Silkscreen, mask and mechanical layers (free items; w line width, h text height)
Bottom Overlay:
  lines w6: 1825.44,956.69 1795.92,956.69 ccw(c1795.67,939.22) 1778.2,939.47 1778.2,738.19 ccw(c1795.67,737.94) 1795.42,720.47 1825.94,720.47 ccw(c1826.18,737.94) 1843.65,737.7 1843.65,938.98 ccw(c1826.18,939.22) 1826.43,956.69
  text "ST-Link" at 1161.42,897.01 h60
  text "RESET" at 39.37,405.51 h50 r270
  text "JLCJLCJLCJLC" at 917.32,248.03 h31.5
Solder Side:
  circle w10: c3268.27,936.3 r39.42
  circle w10: c79.3,89.84 r39.42
  rectangle: 3230.87,919.57 3304.69,954.02
  rectangle: 3237.76,953.03 3298.79,967.8
  rectangle: 3251.54,895.95 3283.04,976.65
  rectangle: 3236.78,904.8 3298.79,920.55
  rectangle: 47.8,58.35 109.81,74.09
  rectangle: 62.56,49.49 94.06,130.2
  rectangle: 48.79,106.58 109.81,121.34
  rectangle: 41.9,73.11 115.71,107.56
  region: 3276.38,967.06 3276.69,966.3 3276.69,944.88 3298.11,944.88 3298.88,944.56 3299.19,943.8 3299.19,928.8 3298.88,928.03 3298.11,927.72 3276.69,927.72 3276.69,906.3 3276.38,905.53 3275.61,905.22 3260.61,905.22 3259.84,905.53 3259.53,906.3 3259.53,927.72 3238.11,927.72 3237.34,928.03 3237.03,928.8 3237.03,943.8 3237.34,944.56 3238.11,944.88 3259.67,944.88 3259.53,966.29 3259.53,966.3 3259.68,966.68 3259.84,967.06 3260.22,967.22 3260.6,967.38 3260.61,967.38 3275.61,967.38
  region: 87.4,120.61 87.72,119.84 87.72,98.43 109.13,98.43 109.9,98.11 110.22,97.34 110.22,82.34 109.9,81.58 109.13,81.26 87.72,81.26 87.72,59.84 87.4,59.08 86.63,58.76 71.63,58.76 70.87,59.08 70.55,59.84 70.55,81.26 49.13,81.26 48.37,81.58 48.05,82.34 48.05,97.34 48.37,98.11 49.13,98.43 70.69,98.43 70.55,119.84 70.71,120.22 70.86,120.6 70.87,120.6 70.87,120.61 71.25,120.76 71.63,120.93 71.63,120.92 71.63,120.93 86.63,120.93
Mechanical 1:
  lines w2: 2120.54,490.22 cw(c2242.13,708.66) 2363.71,490.22 ; 2121.06,490.16 2242.13,490.16 2363.19,490.16 ; 2870.54,490.22 cw(c2992.13,708.66) 3113.71,490.22 ; 2871.06,490.16 2992.13,490.16 3113.19,490.16
  lines w10: 0,0 464.57,0 464.57,196.85 1003.94,196.85 1003.94,0 3346.46,0 3346.46,1023.62 0,1023.62 0,0
Mechanical 15:
  lines w7.87: 2202.76,708.66 2281.5,708.66 ; 2242.13,669.29 2242.13,748.03 ; 2952.76,708.66 3031.5,708.66 ; 2992.13,669.29 2992.13,748.03
ASSY_TOP:
  drawing of 322 lines, arcs and shapes, not listed
  text "SH" at 15794.22,11808.37 h100
  text "DWG NO" at 12835.46,11792.06 h100
  text ".DocNumber" at 13491.02,11680.22 h120
  text "2" at -7729.26,11661.01 h200
  text "4" at 777.55,11661.01 h200
  text "8" at 17484.56,11661.01 h200
  text "1" at -11970.52,11654.72 h200
  text "3" at -3477.53,11654.72 h200
  text "5" at 5029.48,11654.72 h200
  text "6" at 9279.37,11654.72 h200
  text "1" at 15991.02,11640.22 h120
  text "REVISION HISTORY" at 13871.02,11389.11 h100
  text "REV" at 12911.02,11150.22 h100
  text "DESCRIPTION" at 14711.02,11150.22 h100
  text "DATE" at 17011.02,11150.22 h100
  text "APPROVED" at 18211.02,11150.22 h100
  text ".Hist1Rev" at 12946.65,10969.11 h100
  text ".Hist1Desc" at 13411.02,10950.22 h100
  text ".Hist1Date" at 16711.02,10950.22 h100
  text ".Hist1Appr" at 17911.02,10950.22 h100
  text "NOTES" at -12488.98,10900 h400
  text ".Hist2Rev" at 12946.65,10748.11 h100
  text ".Hist2Desc" at 13411.02,10729.22 h100
  text ".Hist2Date" at 16711.02,10729.22 h100
  text ".Hist2Appr" at 17911.02,10729.22 h100
  text "1. DIMENSIONING AND TOLERANCING PER ASME Y14.5M-1994" at -12488.98,10600 h200
  text ".Hist3Rev" at 12946.65,10528.11 h100
  text ".Hist3Desc" at 13411.02,10509.22 h100
  text ".Hist3Date" at 16711.02,10509.22 h100
  text ".Hist3Appr" at 17911.02,10509.22 h100
  text "2. INTERPRET PER ASME Y14.100M" at -12488.98,10300 h200
  text "3. ASSEMBLE PER IPC-A-610, CLASS 2" at -12488.98,10000 h200
  text "4. SOLDER PER J-STD-001, CLASS 2. USE LEAD-FREE SOLDER" at -12488.98,9700 h200
  text "5. ALL PARTS SHOWN MAY NOT BE INSTALLED. FOR SCHEMATIC, SEE SEPARATE PARTS LIST" at -12488.98,9400 h200
  text "A" at -13626.75,9154.51 h200
  text "A" at 19376.65,9154.51 h200
  text "6. DATA INCLUDED IN PARENTHESIS IS FOR REFERENCE ONLY" at -12488.98,9100 h200
  text "7. FOR COMPONENTS WITH REFERENCE DESIGNATORS, REFER TO PARTS LIST BY REFERENCE DESIGNATION" at -12488.98,8800 h200
  text "8. ELECTROSTATIC DISCHARGE CONTROL PROGRAM FOR PROTECTION OF ELECTRICAL AND ELECTRONIC" at -12488.98,8500 h200
  text "PARTS, ASSEMBLIES, AND EQUIPMENT SHALL BE PER IPC-610 OR BETTER" at -12488.98,8200 h200
  text "9. THE PCB MATERIAL MANUFACTURER'S RECOMMENDATIONS FOR PCB MATERIAL STORAGE, PRE-PROCESS" at -12488.98,7900 h200
  text "BAKEOUT, PROCESSING AND MATERIAL HANDLING SHALL BE STRICTLY FOLLOWED DURING ALL ASSEMBLY" at -12288.98,7600 h200
  text "PROCESSES. DEVIATION FROM THESE STANDARDS REQUIRES WRITTEN AUTHORIZATION FROM OCEAN OPTICS, INC" at -12288.98,7300 h200
  text "10. MARK LAST 3 DIGITS OF DRAWING NUMBER (-XXX) IN A CLEAR AND LEGIBLE MANNER USING POLYIMIDE BRADY LABEL" at -12588.98,7000 h200
  text "11. MARK DOCUMENT REVISION IN A CLEAR AND LEGIBLE MANNER USING POLYIMIDE BRADY LABEL" at -12588.98,6700 h200
  text "12. ALL PROCESSES AND PROCEDURES SHALL BE ROHS COMPLIANT" at -12588.98,6400 h200
  text "13. COMPLETED CIRCUIT CARD ASSEMBLIES SHALL BE PACKAGED INDIVIDUALLY" at -12588.98,6100 h200
  text "IN STATIC SHIELDING PACKAGING IN ACCORDANCE WITH ANSI/ESD-S-20.20" at -12288.98,5800 h200
  text "B" at -13628.74,3648.25 h200
  text "B" at 19374.67,3648.25 h200
  text "Dimensions in mm" at 14724.41,-1496.06 h250
  text "Scale  3:1" at 10590.55,-1653.54 h500
  text "C" at -13605.73,-1842.84 h200
  text "C" at 19397.68,-1842.84 h200
  text "SEE SEPARATE PARTS LIST." at 8801.02,-6519.78 h400
  text "DFTG" at 10411.02,-6870.89 h100
  text ".NameDftg" at 10931.02,-6870.89 h100
  text ".DateDftg" at 12491.02,-6870.89 h100
  text "UNLESS OTHERWISE SPECIFIED," at 8251.02,-7040.89 h80
  text "MATERIAL:" at 5764.02,-7049.78 h100
  text "ENG" at 10411.02,-7130.89 h100
  text ".NameEng" at 10931.02,-7130.89 h100
  text ".DateEng" at 12491.02,-7130.89 h100
  text "INCHES" at 9671.02,-7179.78 h80
  text "DIMENSIONS ARE IN" at 8251.02,-7180.89 h80
  text "D" at -13615.65,-7342.81 h200
  text "D" at 19387.76,-7342.81 h200
  text "MECH" at 10411.02,-7350.89 h100
  text "*" at 10931.02,-7370.89 h100
  text "*" at 12491.02,-7370.89 h100
  text "TITLE:" at 14025.6,-7450.89 h100
  text "TOLERANCES:" at 8251.02,-7490.89 h100
  text "SEE NOTES" at 5836.02,-7569.78 h100
  text "MFG" at 10411.02,-7610.89 h100
  text "*" at 10931.02,-7610.89 h100
  text "*" at 12491.02,-7630.89 h100
  text ".X +/- 0.1" at 8291.02,-7670.89 h100
  text ".XX +/- 0.01" at 8291.02,-7790.89 h100
  text ".TitleCCA" at 14286.02,-7804.78 h220
  text ".XXX +/- 0.001" at 8291.02,-7910.89 h100
  text ".Title0" at 15055.51,-8178.35 h220
  text "THIRD ANGLE PROJECTION" at 5821.02,-8365.78 h100
  text "ALL SHEETS ARE THE" at 8431.02,-8527.11 h100
  text ".Title1" at 14461.02,-8550 h220
  text "SAME REVISION STATUS" at 8338.52,-8707.11 h100
  text "SIZE" at 14031.02,-8830.89 h100
  text "DRAWING NUMBER" at 14411.02,-8830.89 h100
  text "REV" at 18626.45,-8891.95 h120
  text "D" at 14032.69,-9139.59 h200
  text ".DocNumber" at 14411.02,-9149.78 h260
  text ".Rev" at 18611.02,-9149.78 h200
  text "1" at 18011.02,-9349.78 h100
  text "2" at 18611.02,-9349.78 h100
  text "1:1" at 14561.02,-9359.78 h100
  text "SCALE" at 14008.84,-9366.65 h100
  text "SHEET   OF" at 17391,-9375.11 h100
  text "8" at 17701.02,-9789.78 h200
  text "1" at -11963.98,-9799.78 h200
  text "2" at -7729.26,-9838.9 h200
  text "4" at 777.55,-9838.9 h200
  text "3" at -3477.53,-9845.19 h200
  text "5" at 5029.48,-9845.19 h200
  text "6" at 9279.37,-9845.19 h200
  text "7" at 13530.3,-9845.19 h200
Drill Drawing:
  lines w15: -10907.39,-7099.78 -10907.39,-6799.78 ; -10209.58,-7099.78 -10209.58,-6799.78 ; -8863.98,-7099.78 -8863.98,-6799.78 ; -8358.1,-7099.78 -8358.1,-6799.78 ; -11458.27,-7099.78 -7579.3,-7099.78 -7579.3,-6799.78 -11458.27,-6799.78 -11458.27,-7099.78 ; -11458.27,-6949.78 -7579.3,-6949.78 -11458.27,-6949.78
  text "Symbol" at -11368.27,-6904.78 h72
  text "Hit Count" at -10862.39,-6904.78 h72
  text "Finished Hole Size" at -10164.58,-6904.78 h72
  text "Plated" at -8818.98,-6904.78 h72
  text "Hole Type" at -8313.1,-6904.78 h72
ASSY_BOT:
  lines w7.8: -12883.55,11130.22 -6595.55,11130.22 ; -12883.55,11330.22 -6595.55,11330.22 ; -11580.55,11135.22 -11580.34,11550.13 ; -10295.55,11115.22 -10295.55,11550.22 ; -7095.55,10905.22 -7095.55,11550.22 ; -13888.98,-9942 -13888.98,12050.22 ; -13888.98,-9942 20104.45,-9942 ; -13888.98,-9942 20104.45,-9942 ; -13888.98,-9942 -13888.98,12050.22 ; -13888.98,12050.22 20104.45,12050.22 ; -13888.98,12050.22 20104.45,12050.22 ; 20104.45,-9942 20104.45,12050.22 ; 20104.45,-9942 20104.45,12050.22
  lines w23.6: -13646.14,-4199.9 -12896.14,-4199.9 ; -13646.14,6550.06 -12896.14,6550.06 ; -12896.15,11550.02 -12896.15,-9449.87 ; -12896.14,-8699.88 -7776.15,-8699.88 ; -12305.15,-9199.88 -12305.15,-8699.88 ; -11146.16,-9449.87 -11146.16,-9199.88 ; -9646.16,-9824.87 -9646.16,-9449.87 ; -7776.17,-9444.78 -7776.17,-8714.87 ; -6600.34,10880.22 -6600.34,11550.13 ; -5396.17,-9824.87 -5396.17,-9449.87 ; -5396.17,11550.02 -5396.17,11925.02 ; -1146.18,-9824.87 -1146.18,-9449.87 ; -1146.18,11550.02 -1146.18,11925.02 ; 7353.81,-9824.87 7353.81,-9449.87 ; 7353.81,11550.02 7353.81,11925.02 ; 11603.8,-9824.87 11603.8,-9449.87 ; 15853.79,-9824.87 15853.79,-9449.87 ; 15853.79,11550.02 15853.79,11925.02 ; 19103.79,6550.06 19853.79,6550.06 ; 19103.79,11550.13 -12896.66,11550.13 ; 19128.79,-4199.9 19878.79,-4199.9 ; -12896.66,11550.13 -12896.66,10743.95 -12896.66,11550.13 ; -12896.15,-9449.87 19103.79,-9449.87 ; -12896.15,-9449.87 19103.79,-9449.87 ; -12896.15,-9449.87 19103.79,-9449.87 ; -12896.15,-9449.87 19103.79,-9449.87 ; -12896.14,-9199.88 -7776.15,-9199.88 ; -12896.14,-9199.88 -7776.15,-9199.88 ; -12896.14,-9199.88 -7776.15,-9199.88 ; -12896.14,-9199.88 -7776.15,-9199.88 ; -10046.15,11550.02 -10046.15,11930.03 ; -10046.15,11550.02 -10046.15,11930.03 ; -10046.15,11550.02 -10046.15,11930.03 ; -10046.15,11550.02 -10046.15,11930.03 ; -10046.15,11550.02 -10046.15,11930.03 ; -10046.15,11550.02 -10046.15,11930.03 ; -10046.15,11550.02 -10046.15,11930.03 ; -10046.15,11550.02 -10046.15,11930.03 ; -10046.15,11930.03 -6599.55,11930.03 ; -10046.15,11930.03 -6796.15,11930.03 -10046.15,11930.03 ; -10046.15,11930.03 -6599.55,11930.03 ; -9546.15,11550.02 -9546.15,11930.03 ; -9546.15,11550.02 -9546.15,11930.03 ; -9546.15,11550.02 -9546.15,11930.03 ; -9546.15,11550.02 -9546.15,11930.03 ; -6599.55,11930.03 -6599.55,11550.02 -6599.55,11930.03 ; 11603.8,11550.02 11603.8,11925.02 ; 11603.8,11550.02 11603.8,11925.02 ; 11603.8,11550.02 11603.8,11925.02 ; 11603.8,11550.02 11603.8,11925.02 ; 19103.79,-9449.87 19103.79,11242.06 19103.79,-9449.87 ; 19103.79,-9449.87 19103.79,11550.02 ; 19103.79,-9449.87 19103.79,11550.02 ; 19103.79,-9449.87 19103.79,11550.02 ; -13296.15,1020.08 -13296.15,1080.08 -13096.15,1080.08 -13096.15,1150.08 -12896.15,1050.08 -13096.15,950.08 -13096.15,1020.08 -13296.15,1020.08 ; 3003.83,-9649.87 3103.82,-9449.87 3203.82,-9649.87 3133.83,-9649.87 3133.83,-9849.87 3073.82,-9849.87 3073.82,-9649.87 3003.83,-9649.87 ; 3003.83,11750.02 3103.82,11550.02 3203.82,11750.02 3133.82,11750.02 3133.82,11950.02 3073.82,11950.02 3073.82,11750.02 3003.83,11750.02 ; 19103.79,1050.08 19303.79,950.08 19303.79,1020.08 19503.79,1020.09 19503.79,1080.08 19303.79,1080.08 19303.79,1150.08 19103.79,1050.08
  text "SH" at -9578.74,11808.37 h100
  text "DWG NO" at -6619.98,11792.06 h100
  text ".DocNumber" at -7275.55,11680.22 h120
  text "8" at -11269.09,11661.01 h200
  text "4" at 5437.93,11661.01 h200
  text "2" at 13944.73,11661.01 h200
  text "6" at -3063.9,11654.72 h200
  text "5" at 1185.99,11654.72 h200
  text "3" at 9693,11654.72 h200
  text "3" at 9693,11654.72 h200
  text "1" at 18185.99,11654.72 h200
  text "1" at -9775.55,11640.22 h120
  text "REVISION HISTORY" at -7655.55,11389.11 h100
  text "APPROVED" at -11995.55,11150.22 h100
  text "DATE" at -10795.55,11150.22 h100
  text "DESCRIPTION" at -8495.55,11150.22 h100
  text "REV" at -6695.55,11150.22 h100
  text "SEE SHEET 1" at -7195.55,10950.22 h100
  text "A" at -13161.18,9154.51 h200
  text "A" at 19842.23,9154.51 h200
  text "B" at -13159.2,3648.25 h200
  text "B" at 19844.21,3648.25 h200
  text "Scale  3:1" at 12494.49,-1618.9 h500
  text "C" at -13182.21,-1842.84 h200
  text "C" at 19821.2,-1842.84 h200
  text "D" at -13172.28,-7342.81 h200
  text "D" at 19831.12,-7342.81 h200
  text "REV" at -12410.98,-8891.95 h120
  text ".DocNumber" at -8020.55,-9099.78 h200
  text ".Rev" at -12395.55,-9149.78 h200
  text "2" at -12395.55,-9349.78 h100
  text "SHEET 2 OF" at -11175.53,-9375.11 h100
  text "8" at -11485.55,-9789.78 h200
  text "1" at 18186.02,-9799.78 h200
  text "4" at 5437.93,-9838.9 h200
  text "2" at 13944.73,-9838.9 h200
  text "7" at -7314.82,-9845.19 h200
  text "6" at -3063.9,-9845.19 h200
  text "5" at 1185.99,-9845.19 h200
  text "3" at 9693,-9845.19 h200
PCB_SHEET1:
  drawing of 741 lines, arcs and shapes, not listed
  text "SH" at 15794.22,11808.15 h100
  text "DWG NO" at 12835.46,11791.84 h100
  text "DWG NO" at 12835.46,11792.06 h100
  text ".DocNumberPCB" at 13491.02,11680 h120
  text "2" at -7729.26,11660.79 h200
  text "4" at 777.55,11660.79 h200
  text "8" at 17484.56,11660.79 h200
  text "1" at -11970.52,11654.5 h200
  text "3" at -3477.53,11654.5 h200
  text "5" at 5029.48,11654.5 h200
  text "6" at 9279.37,11654.5 h200
  text "1" at 15991.02,11640 h120
  text "REVISION HISTORY" at 13871.02,11388.89 h100
  text "REV" at 12911.02,11150 h100
  text "DESCRIPTION" at 14711.02,11150 h100
  text "DATE" at 17011.02,11150 h100
  text "APPROVED" at 18211.02,11150 h100
  text "11" at 1211.02,11000 h200
  text "5" at 1591.02,11000 h200
  text ".Hist1Rev" at 12946.65,10968.89 h100
  text "LAYER STACKUP:" at 1991.02,10950 h400
  text ".Hist1Desc" at 13411.02,10950 h100
  text ".Hist1Date" at 16711.02,10950 h100
  text ".Hist1Appr" at 17911.02,10950 h100
  text "NOTES" at -12488.98,10900 h400
  text ".Hist2Rev" at 12946.65,10749.89 h100
  text ".Hist2Desc" at 13411.02,10731 h100
  text ".Hist2Date" at 16711.02,10731 h100
  text ".Hist2Appr" at 17911.02,10731 h100
  text "1. UNLESS OTHERWISE SPECIFIED, DIMENSIONS, TOLERANCES, AND SURFACE TEXTURE APPLY" at -12488.98,10600 h200
  text ".Hist3Rev" at 12946.65,10528.89 h100
  text ".Hist3Desc" at 13411.02,10510 h100
  text ".Hist3Date" at 16711.02,10510 h100
  text ".Hist3Appr" at 17911.02,10510 h100
  text "AFTER PLATING OR CHEMICAL FILM TREATMENTS, AND PRIOR TO ORGANIC COATINGS." at -12288.98,10300 h200
  text "Layer" at 1210.72,10098.5 h60
  text "Name" at 1624.63,10098.5 h60
  text "Material" at 2568.37,10098.5 h60
  text "Thickness" at 3432.14,10098.5 h60
  text "Constant" at 4085.98,10098.5 h60
  text "Board Layer Stack" at 4659.84,10098.5 h60
  text "2. DIMENSIONING AND TOLERANCING PER ASME Y14.5M-1994" at -12488.98,10000 h200
  text "1" at 1210.72,9978.5 h60
  text "Top Overlay" at 1624.63,9978.5 h60
  text "2" at 1210.72,9858.5 h60
  text "Top Solder" at 1624.63,9858.5 h60
  text "Solder Resist" at 2568.37,9858.5 h60
  text "0.40mil" at 3432.14,9858.5 h60
  text "3.5" at 4085.98,9858.5 h60
  text "3" at 1210.72,9738.5 h60
  text "Component Side" at 1624.63,9738.5 h60
  text "Copper" at 2568.37,9738.5 h60
  text "1.40mil" at 3432.14,9738.5 h60
  text "3. PARTS SHALL BE FREE OF BURRS AND SHARP EDGES. BREAK SHARP EDGES .005\" MAX" at -12488.98,9700 h200
  text "4" at 1210.72,9618.5 h60
  text "Dielectric 1" at 1624.63,9618.5 h60
  text "FR-4" at 2568.37,9618.5 h60
  text "39.37mil" at 3432.14,9618.5 h60
  text "4.2" at 4085.98,9618.5 h60
  text "5" at 1210.72,9498.5 h60
  text "Bottom Layer" at 1624.63,9498.5 h60
  text "Copper" at 2568.37,9498.5 h60
  text "1.40mil" at 3432.14,9498.5 h60
  text "4. UNLESS OTHERWISE SPECIFIED, BOARD SHALL MEET THE REQUIREMENTS OF IPC-6011" at -12488.98,9400 h200
  text "6" at 1210.72,9378.5 h60
  text "Solder Side" at 1624.63,9378.5 h60
  text "Solder Resist" at 2568.37,9378.5 h60
  text "0.40mil" at 3432.14,9378.5 h60
  text "3.5" at 4085.98,9378.5 h60
  text "7" at 1210.72,9258.5 h60
  text "Bottom Overlay" at 1624.63,9258.5 h60
  text "A" at -13626.75,9154.29 h200
  text "A" at 19376.65,9154.29 h200
  text "CLASS 2, AND IPC-6012, TYPE 2." at -12288.98,9100 h200
  text "OVERALL HEIGHT = 0.xxx +/- 10%" at 896.02,8920.22 h200
  text "5. MATERIAL: POLYCLAD 370HR OR EQUIVALENT IAW IPC-4101. THIS BOARD IS INTENDED FOR LEAD-FREE" at -12488.98,8800 h200
  text "TOP AND BOTTOM LAYER COPPER THICKNESS SPECIFIED AFTER PLATING" at 896.02,8645 h200
  text "ASSEMBLY (RoHS COMPLIANT). FLAMMABILITY RATING OF 94V-0 OR BETTER REQUIRED. BOARD MUST BE UL" at -12288.98,8500 h200
  text "RECOGNIZED AND VENDOR SHALL AFFIX UL LISTING DESIGNATION ON PRINTED CIRCUIT BOARD." at -12288.98,8200 h200
  text "A. BASE LAMINATE: WOVEN GLASS BASED EPOXY RESIN." at -12288.98,7900 h200
  text "SEE STACK DETAIL FOR COPPER WEIGHT, SUBSTRATES, AND FINISHED BOARD THICKNESS" at -12038.98,7600 h200
  text "B. BONDING AGENT: PREIMPREGNATED B-STAGE EPOXY CLOTH (GF)" at -12288.98,7300 h200
  text "C. FINISH TO BE DONE USING IMMERSION GOLD (ENIG) 3-6 MICROINCHES OVER NICKEL 100 MICROINCHES MIN." at -12288.98,7000 h200
  text "FULL BODY IMMERSION GOLD ACCEPTED." at -12038.98,6700 h200
  text "D. SILKSCREEN TO BE DONE USING NON-CONDUCTIVE WHITE EPOXY INK. VENDOR MAY VIA CAP OR PLUG VIAS" at -12288.98,6400 h200
  text "BEFORE FINAL SOLDERMASK TO AVOID TRIMMING OF SILKSCREEN. SILKSCREEN INK NOT ALLOWED ON ANY" at -12038.98,6100 h200
  text "EXPOSED ETCH. VENDOR TO DETERMINE BEST PROCESS TO ENSURE THIS." at -12038.98,5800 h200
  text "E. SOLDERMASK OVER BARE COPPER FOLLOWED BY PLATING PER LAYER STACKUP." at -12288.98,5500 h200
  text "SOLDERMASK IS TO BE FREE OF SHADED AREAS, AND IS TO BE BLACK, TYPE B1, CLASS 2, IAW IPC-SM-840." at -12038.98,5200 h200
  text "6. FINAL TRACES WIDTHS AND LAND SIZES REPRESENTED BY ARTWORK. THE FINAL" at -12488.98,4900 h200
  text "CONDUCTOR WIDTH SHALL BE +/- 0.001\" OF THE ORIGINAL ARTWORK TRACE. THE PCB" at -12288.98,4600 h200
  text "MANUFACTURER IS DIRECTED TO INFLATE FEATURES IN THE SUPPLIED GERBER FILES, AS" at -12288.98,4300 h200
  text "NECESSARY, TO COMPENSATE FOR THE ETCHBACK IN THE PCB MANUFACTURER'S PROCESS." at -12288.98,4000 h200
  text "7. MANUFACTURER TO INSERT COMPANY LOGO AND DATE CODE IN BOTTOM SILKSCREEN," at -12513.98,3700 h200
  text "B" at -13628.74,3648.02 h200
  text "B" at 19374.67,3648.02 h200
  text "USING PREFERRED METHOD (NON-CONDUCTIVE)." at -12288.98,3400 h200
  text "8. UNLESS OTHERWISE SPECIFIED:" at -12513.98,3100 h200
  text "A. ALL HOLES TO BE CONCENTRIC WITH PAD CENTER WITHIN +/- 0.005\"." at -12288.98,2800 h200
  text "B. ALL HOLE DIAMETERS TO BE WITHIN +/- 0.003\" OF SPECIFIED DIAMETER." at -12288.98,2500 h200
  text "C. PLATED THROUGH HOLE DIAMETERS SPECIFIED AFTER PLATING." at -12288.98,2200 h200
  text "9. FABRICATE AND TEST BOARD, TYPE 2, CLASS 1, LEVEL A, PER IPC-D-275. VENDOR MUST USE IPC D 356 NETLIST" at -12488.98,1900 h200
  text "PROVIDED PRIOR TO BOARD FABRICATION AND REPORT ANY DISCREPANCIES WHEN COMPARED WITH THE GERBERS." at -12288.98,1600 h200
  text "10. INFORMATION IN PARENTHESIS IS FOR REFERENCE ONLY." at -12488.98,1300 h200
  text "11. MAINTAIN CONTROLLED IMPEDANCES:" at -12500.66,971.48 h200
  text "A. HS-USB - Bottom Layer differential pair; 90 ohms differential impedance; Length differences < 25 mils" at -12307.16,698.66 h200
  text "Trace Width = 15.0mils; Inside Gap = 6.3mils. (Microstrip Differential Pair)" at -12064.21,411.2 h200
  text "12. VENDOR IS ALLOWED TO DO THE FOLLOWING:" at -12527.48,90.7 h200
  text "A. FOLLOW BOARD OUTLINE FOR SIZE OF BOARD." at -12307.16,-205.8 h200
  text "B. REMOVE INTERNAL NON FUNCTIONAL PADS." at -12307.16,-502.29 h200
  text "C. ADD TEAR DROPPING" at -12307.16,-798.79 h200
  text "D. REMOVE SOLDERMASK SLIVERS LESS THAN 0.003 TO ENHANCE PRODUCABILITY." at -12307.16,-1095.28 h200
  text "Scale  3:1" at 10604.72,-1618.9 h500
  text "C" at -13605.73,-1843.06 h200
  text "C" at 19397.68,-1843.06 h200
  text "DFTG" at 10411.02,-6871.11 h100
  text ".NameDftg" at 10931.02,-6871.11 h100
  text ".DateDftg" at 12491.02,-6871.11 h100
  text "UNLESS OTHERWISE SPECIFIED," at 8251.02,-7041.11 h80
  text "MATERIAL:" at 5764.02,-7050 h100
  text "ENG" at 10411.02,-7131.11 h100
  text ".NameEng" at 10931.02,-7131.11 h100
  text ".DateEng" at 12491.02,-7131.11 h100
  text "INCHES" at 9671.02,-7180 h80
  text "DIMENSIONS ARE IN" at 8251.02,-7181.11 h80
  text "D" at -13615.65,-7343.04 h200
  text "D" at 19387.76,-7343.04 h200
  text "MECH" at 10411.02,-7351.11 h100
  text "*" at 10931.02,-7371.11 h100
  text "*" at 12491.02,-7371.11 h100
  text "TITLE:" at 14025.6,-7451.12 h100
  text "TOLERANCES:" at 8251.02,-7491.11 h100
  text "SEE NOTES" at 5836.02,-7570 h100
  text "MFG" at 10411.02,-7611.11 h100
  text "*" at 10931.02,-7611.11 h100
  text "*" at 12491.02,-7631.11 h100
  text ".X +/- 0.1" at 8291.02,-7670.89 h100
  text ".XX +/- 0.01" at 8291.02,-7790.89 h100
  text ".TitlePCB" at 14281.02,-7800 h220
  text ".XXX +/- 0.005" at 8291.02,-7910.89 h100
  text ".Title0" at 15057.48,-8186.22 h220
  text "THIRD ANGLE PROJECTION" at 5821.02,-8366 h100
  text "ALL SHEETS ARE THE" at 8431.02,-8527.33 h100
  text ".Title1" at 14461.02,-8550 h220
  text "SAME REVISION STATUS" at 8338.52,-8707.33 h100
  text "SIZE" at 14031.02,-8831.11 h100
  text "DRAWING NUMBER" at 14411.02,-8831.11 h100
  text "REV" at 18626.45,-8892.17 h120
  text "D" at 14032.69,-9139.81 h200
  text ".DocNumberPCB" at 14411.02,-9150 h260
  text ".Rev" at 18611.02,-9150 h200
  text "1" at 18011.02,-9350 h100
  text "1" at 18611.02,-9350 h100
  text "1:1" at 14561.02,-9360 h100
  text "SCALE" at 14008.84,-9366.87 h100
  text "SHEET   OF" at 17391,-9375.34 h100
  text "8" at 17701.02,-9790 h200
  text "1" at -11963.98,-9800 h200
  text "2" at -7729.26,-9839.12 h200
  text "4" at 777.55,-9839.12 h200
  text "3" at -3477.53,-9845.41 h200
  text "5" at 5029.48,-9845.41 h200
  text "6" at 9279.37,-9845.41 h200
  text "7" at 13530.3,-9845.41 h200